# Altium PCB PCB2.PcbDoc
Units mm, origin at the board's own origin, x right, y up, seen from the top; angles counter-clockwise.
Board outline 212.09 x 134.75 mm, 2 copper layers (Top Layer, Bottom Layer); 121 components, 76 nets, 330 pads, 8 vias.
Unrouted connection lines stored in the file: 1.
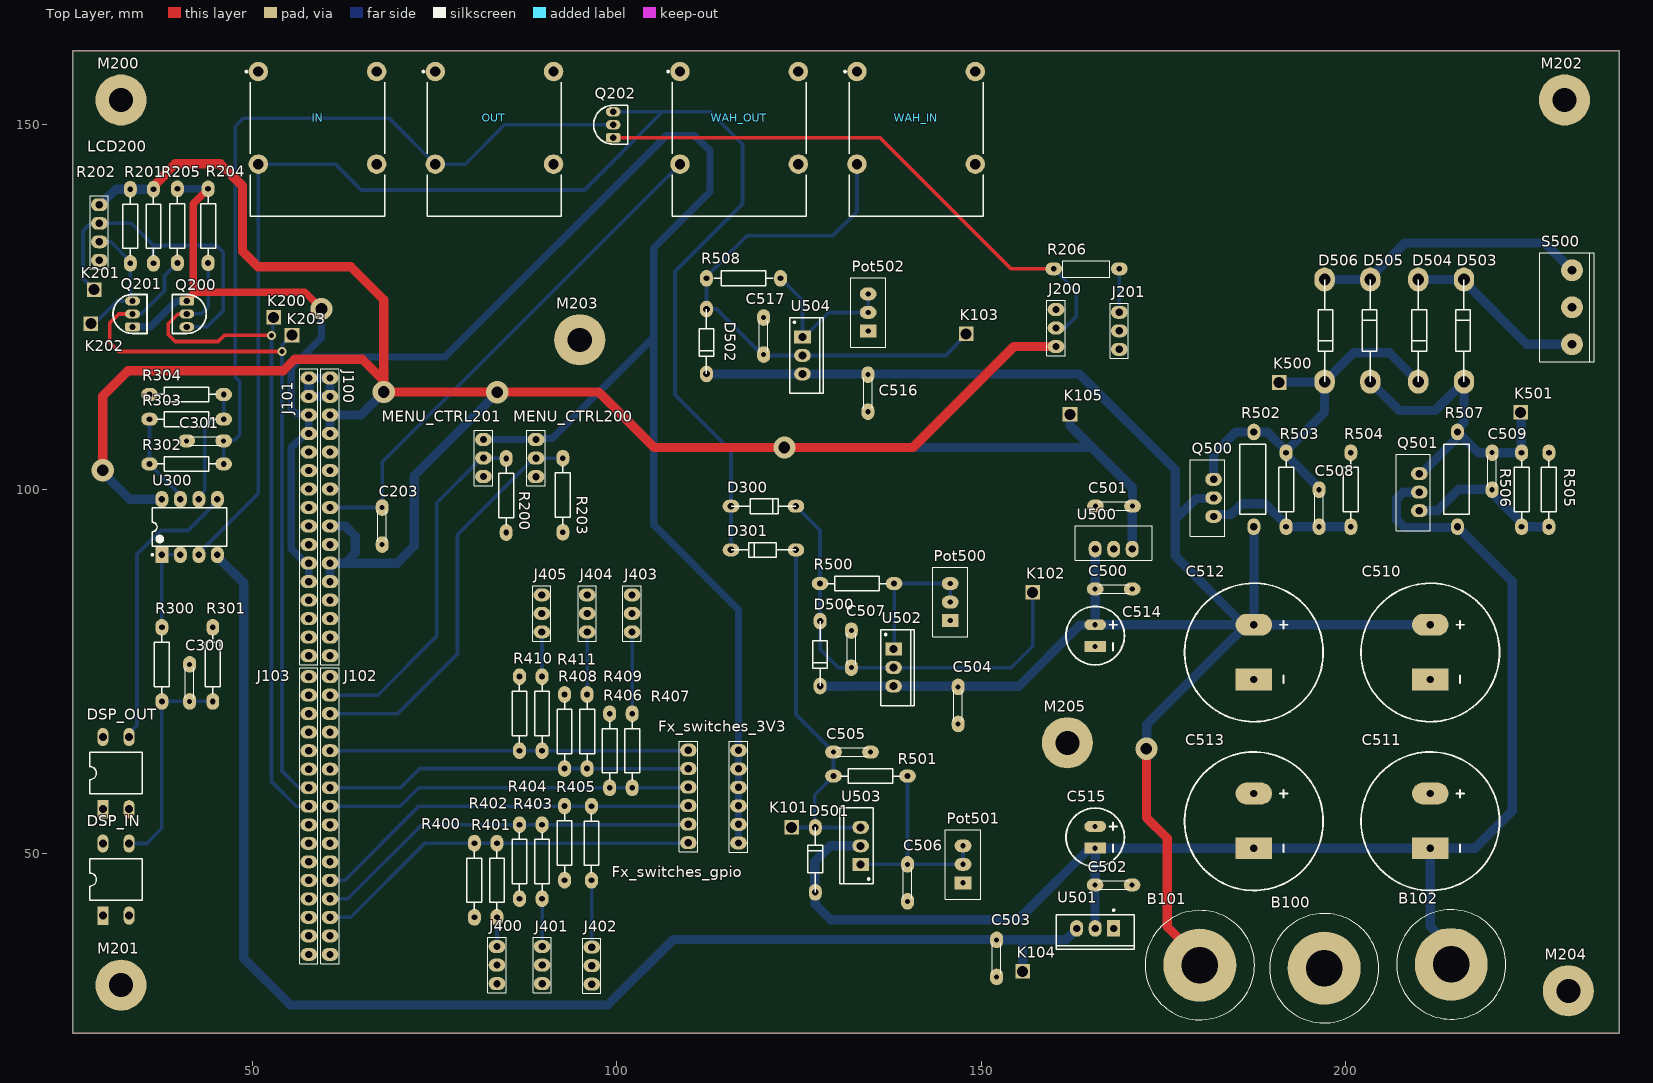
[diagram p0: Top Layer view]
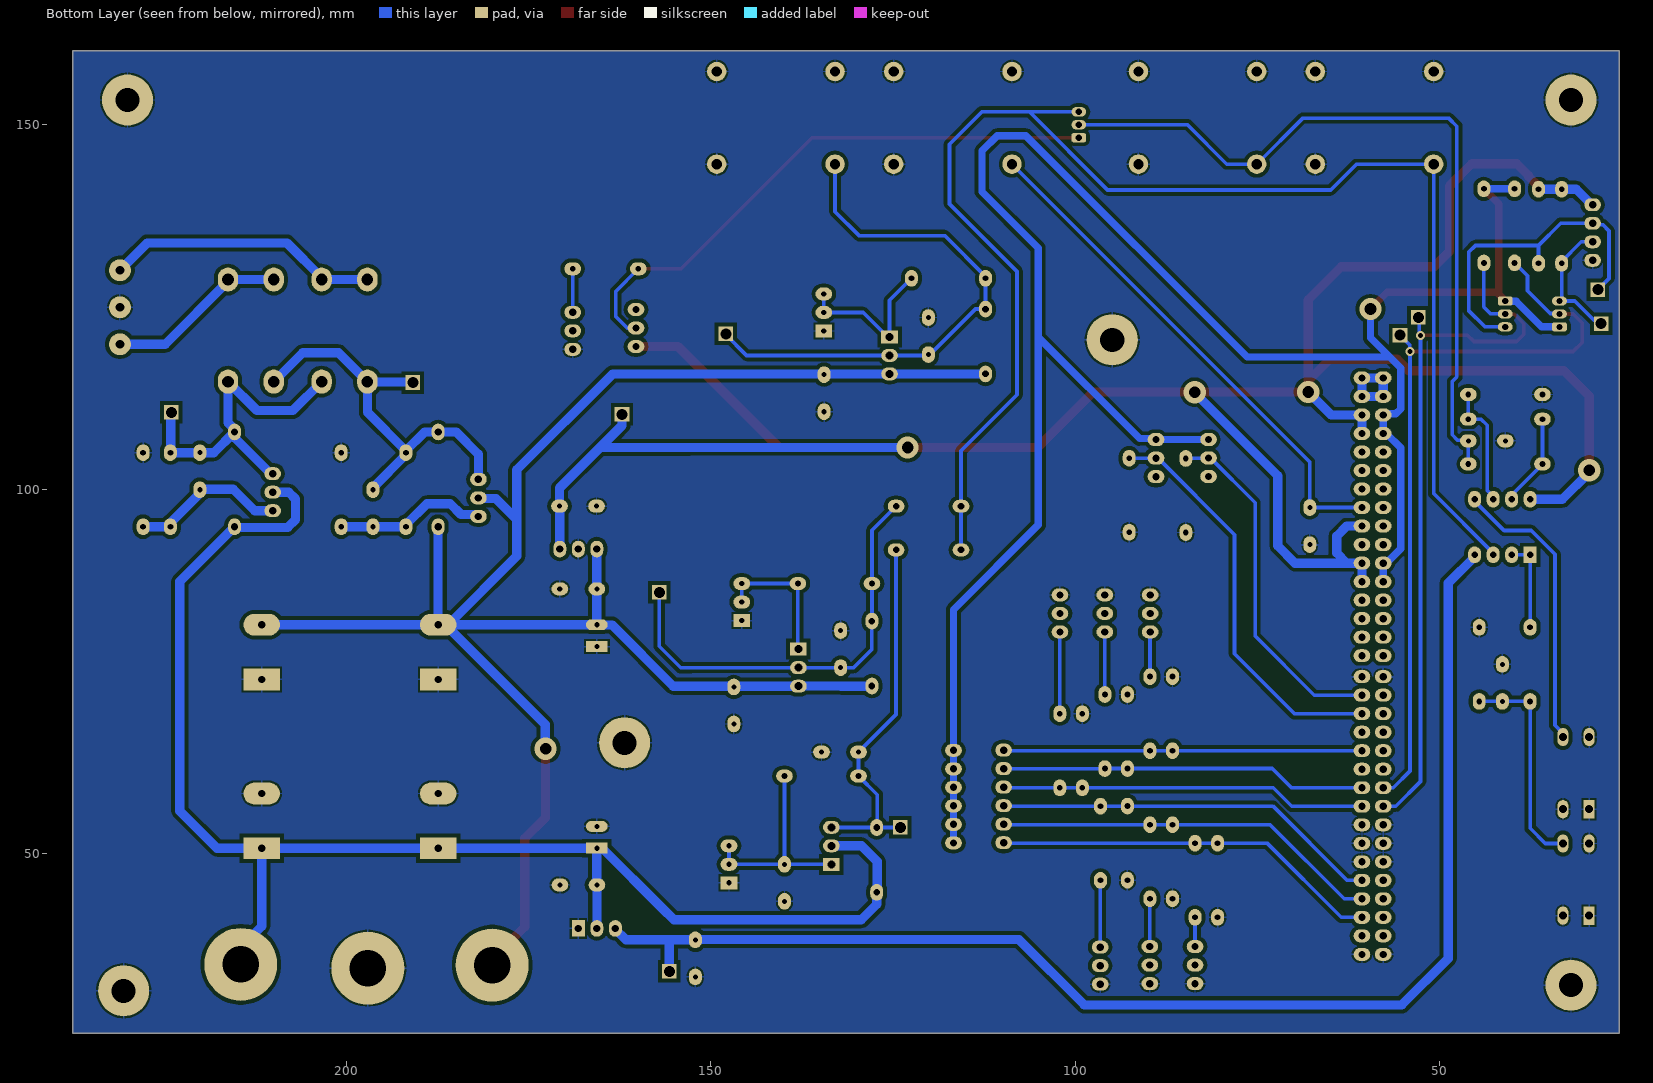
[diagram p1: Bottom Layer view, seen from below]

## Layer stack, top to bottom
Top Solder: solder mask 0.0102, Solder Resist, Dk 3.5
Top Layer: signal copper 0.0356
Dielectric 1: dielectric 0.32, FR-4, Dk 4.8
Bottom Layer: signal copper 0.0356
Bottom Solder: solder mask 0.0102, Solder Resist, Dk 3.5

## Board outline
25.4,25.4 237.49,25.4 237.49,160.147 25.4,160.147

## Design rules (kind name [scope] priority, off if disabled: settings)
Clearance [All] p1: gap=0.508 ignorepadtopadclearanceinfootprint=FALSE
PolygonConnect [All] p1: connectstyle=Relief reliefconductorwidth=0.254 reliefentries=4 polygonreliefangle="90 Angle" airgapwidth=0.254
RoutingVias [All] p1: holewidth=0.711 width=1.27 viastyle="Through Hole" minholewidth=0.711 minwidth=1.27 maxholewidth=0.711 maxwidth=1.27
SolderMaskExpansion [All] p1: expansion=0.102 istentingtop=FALSE
SupplyNets "Schematic Supply Nets_11" [InNet('+3V3')] p1: voltage=0.000
SupplyNets "Schematic Supply Nets_9" [InNet('+5V')] p2: voltage=0.000
SupplyNets "Schematic Supply Nets_8" [InNet('+2V')] p3: voltage=0.000
SupplyNets "Schematic Supply Nets_7" [InNet('-5V')] p4: voltage=0.000
SupplyNets "Schematic Supply Nets_6" [InNet('GND')] p5: voltage=0.000
SupplyNets "Schematic Supply Nets_5" [InNet('+1V75')] p6: voltage=0.000
SupplyNets "Schematic Supply Nets_4" [InNet('-6V')] p7: voltage=0.000
SupplyNets "Schematic Supply Nets_2" [InNet('-1V75')] p8: voltage=0.000
SupplyNets "Schematic Supply Nets_1" [InNet('+6V')] p9: voltage=0.000
Width [All] p1: maxlimit=1.27 minlimit=0.508 preferedwidth=0.508 minimp=50.000000 maximp=50.000000 favimp=50.000000
30 further rules are at their usual default settings.

## Classes and differential pairs
component class switches_connectors: C203 Fx_switches_3V3 J200 J201 K200 K201 K202 K203 LCD200 M200 M201 M202 M203 M204 M205 MENU_CTRL200 MENU_CTRL201 Q200 Q201 Q202 R200 R201 R202 R203 R204 R205 R206 WAH_IN
component class shift_registers: Fx_switches_gpio J400 J401 J402 J403 J404 J405 R400 R401 R402 R403 R404 R405 R406 R407 R408 R409 R410 R411
component class power_supply: C500 C501 C502 C503 C504 C505 C506 C507 C508 C509 C510 C511 C512 C513 C514 C515 C516 C517 D500 D501 D502 D503 D504 D505 D506 K500 K501 Pot500 Pot501 Pot502 Q500 Q501 R500 R501 R502 R503 R504 R505 R506 R507 R508 S500 U500 U501 U502 U503 U504
component class main: B100 B101 B102 J100 J101 J102 J103 K101 K102 K103 K104 K105
component class amplifier_stage: C300 C301 DSP_IN DSP_OUT IN OUT R300 R301 R302 R303 R304 U300

## Components (designator, comment, footprint, x,y, rotation, side; value= is the part's Value field where it differs from the comment)
B100 "Banana Plug" "Banana Plug through" 197.032,34.325 r0 top
B101 "Banana Plug" "Banana Plug through" 179.979,34.744 r0 top
B102 "Banana Plug" "Banana Plug through" 214.46,34.841 r0 top
C203 "Cap" Cap-1 67.825,92.426 r90 top value=100nF
C300 "Cap" Cap-1 41.41,75.999 r270 top value=12nF
C301 "Cap" Cap-1 41.001,106.658 r0 top value=5N5F
C500 "Cap" Cap-1 170.705,86.344 r180 top value=100nF
C501 "Cap" Cap-1 165.66,97.703 r0 top value=1uF
C502 "Cap" Cap-1 165.605,45.744 r0 top value=100nF
C503 "Cap" Cap-1 152.106,38.211 r270 top value=1uF
C504 "Cap" Cap-1 146.832,67.828 r90 top value=100nF
C505 "Cap" Cap-1 129.727,63.962 r0 top value=1uF
C506 "Cap" Cap-1 139.887,48.572 r270 top value=100nF
C507 "Cap" Cap-1 132.174,80.629 r270 top value=1uF
C508 "Cap" Cap-1 196.337,94.876 r90 top value=1uF
C509 "Cap" Cap-1 220.075,105.036 r270 top value=1uF
C510 "Cap" "Cap Lyt Ø18" 211.592,81.434 r270 top value=1000uF
C511 "Cap" "Cap Lyt Ø18" 211.592,58.281 r270 top value=1000uF
C512 "Cap" "Cap Lyt Ø18" 187.391,81.434 r270 top value=1000uF
C513 "Cap" "Cap Lyt Ø18" 187.391,58.281 r270 top value=1000uF
C514 "Cap" "Cap Lyt Ø8" 165.625,81.434 r270 top value=220uF
C515 "Cap" "Cap Lyt Ø8" 165.625,53.781 r270 top value=220uF
C516 "Cap" Cap-1 134.449,110.657 r90 top value=100nF
C517 "Cap" Cap-1 120.145,123.567 r270 top value=100nF
D300 "1N4007" 1N4007 115.674,97.694 r0 top
D301 "1N4007" 1N4007 124.574,91.699 r180 top
D500 "1N4007" 1N4007 127.887,81.934 r270 top
D501 "1N4007" 1N4007 127.231,44.724 r90 top
D502 "1N4007" 1N4007 112.307,124.736 r270 top
D503 "Diode" "Diode 1A" 216.212,114.784 r90 top
D504 "Diode" "Diode 1A" 209.933,128.784 r270 top
D505 "Diode" "Diode 1A" 203.371,114.784 r90 top
D506 "Diode" "Diode 1A" 197.092,128.784 r270 top
DSP_IN "3.5MMJACK" 3.5MMJACK 29.506,41.53 r90 top
DSP_OUT "3.5MMJACK" 3.5MMJACK 29.506,56.133 r90 top
Fx_switches_3V3 "Header 1x6" "Header 1x6" 116.703,51.509 r90 top
Fx_switches_gpio "Header 1x6" "Header 1x6" 109.826,64.233 r270 top
IN "NMJ4HFD2" FP-NMJ4HFD2-MFG 58.952,154.087 r90 top
J100 "Header 1x16" "Header 1x16" 60.675,77.186 r90 top
J101 "Header 1x16" "Header 1x16" 57.754,77.186 r90 top
J102 "Header 1x16" "Header 1x16" 60.675,36.215 r90 top
J103 "Header 1x16" "Header 1x16" 57.754,36.215 r90 top
J200 "Header 1x3" "Header 1x3"#1 160.252,119.593 r90 top
J201 "Header 1x3" "Header 1x3"#1 168.928,119.212 r90 top
J400 "Header 1x3" "Header 1x3"#1 83.564,32.209 r90 top
J401 "Header 1x3" "Header 1x3"#1 89.774,32.209 r90 top
J402 "Header 1x3" "Header 1x3"#1 96.576,32.132 r90 top
J403 "Header 1x3" "Header 1x3"#1 102.102,85.521 r270 top
J404 "Header 1x3" "Header 1x3"#1 95.951,85.521 r270 top
J405 "Header 1x3" "Header 1x3"#1 89.718,85.521 r270 top
K101 "Wire" "Wire 1.5mm" 123.983,53.632 r90 top
K102 "Wire" "Wire 1.5mm" 157.042,85.865 r90 top
K103 "Wire" "Wire 1.5mm" 147.924,121.327 r90 top
K104 "Wire" "Wire 1.5mm" 155.68,33.885 r90 top
K105 "Wire" "Wire 1.5mm" 162.171,110.291 r90 top
K200 "Wire" "Wire 1.5mm" 52.946,123.584 r90 top
K201 "Wire" "Wire 1.5mm" 28.315,127.412 r90 top
K202 "Wire" "Wire 1.5mm" 27.861,122.748 r90 top
K203 "Wire" "Wire 1.5mm" 55.454,121.16 r90 top
K500 "Wire" "Wire 1.5mm" 190.858,114.661 r90 top
K501 "Wire" "Wire 1.5mm" 223.993,110.553 r90 top
LCD200 "Header 1x4" "Header 1x4" 29.032,131.424 r90 top
M200 "Screw Hole" "M3 Hole" 32.004,153.416 r0 top
M201 "Screw Hole" "M3 Hole" 32.004,32.004 r0 top
M202 "Screw Hole" "M3 Hole" 229.997,153.416 r0 top
M203 "Screw Hole" "M3 Hole" 94.924,120.519 r0 top
M204 "Screw Hole" "M3 Hole" 230.523,31.22 r0 top
M205 "Screw Hole" "M3 Hole" 161.81,65.241 r0 top
MENU_CTRL200 "Header 1x3" "Header 1x3"#1 81.715,101.766 r90 top
MENU_CTRL201 "Header 1x3" "Header 1x3"#2 88.92,101.749 r90 top
OUT "NMJ4HFD2" FP-NMJ4HFD2-MFG 83.22,154.087 r90 top
Pot500 "Pot Trim" "Pot trim slim high" 145.743,84.538 r90 top value=1k
Pot501 "Pot Trim" "Pot trim slim high" 147.491,48.572 r90 top value=1k
Pot502 "Pot Trim" "Pot trim slim high" 134.487,124.268 r90 top value=1k
Q200 "ModelNum" TO-92_straight 41.025,125.342 r270 top
Q201 "ModelNum" TO-92_straight 33.58,122.795 r90 top
Q202 "ModelNum" TO-92_straight 99.508,148.745 r90 top
Q500 "ModelNum" TO-220#1 181.869,96.293 r90 top
Q501 "ModelNum" TO-220#1 210.083,97.073 r90 top
R200 "Res2" "AXIAL-0.4 PCBK"#1 84.835,99.166 r90 top value=1k
R201 "" "AXIAL-0.4 PCBK"#1 36.453,136.091 r90 top value=4k7
R202 "" "AXIAL-0.4 PCBK"#1 33.276,136.091 r90 top value=4k7
R203 "Res2" "AXIAL-0.4 PCBK"#1 92.599,99.201 r90 top value=1k
R204 "" "AXIAL-0.4 PCBK"#1 43.954,136.149 r90 top value=4k7
R205 "" "AXIAL-0.4 PCBK"#1 39.733,136.156 r90 top value=4k7
R206 "Resistor" "RES THT 9mm" 168.931,130.257 r180 top value=1K
R300 "Res2" "AXIAL-0.4 PCBK"#1 37.6,75.999 r270 top value=1k47
R301 "Res2" "AXIAL-0.4 PCBK"#1 44.585,75.999 r270 top value=1k
R302 "Res2" "AXIAL-0.4 PCBK"#1 41.001,103.492 r0 top value=1k47
R303 "Res2" "AXIAL-0.4 PCBK"#1 41.001,109.63 r180 top value=14k7
R304 "Res2" "AXIAL-0.4 PCBK"#1 41.001,113.017 r0 top value=10k
R400 "" "AXIAL-0.4 PCBK"#1 80.473,46.386 r90 top value=3k
R401 "" "AXIAL-0.4 PCBK"#1 83.565,46.386 r90 top value=300
R402 "" "AXIAL-0.4 PCBK"#1 86.658,48.93 r90 top value=3k
R403 "" "AXIAL-0.4 PCBK"#1 89.751,48.93 r90 top value=300
R404 "" "AXIAL-0.4 PCBK"#1 92.843,51.476 r90 top value=3k
R405 "" "AXIAL-0.4 PCBK"#1 96.535,51.459 r90 top value=300
R406 "" "AXIAL-0.4 PCBK"#1 99.029,64.153 r270 top value=3k
R407 "" "AXIAL-0.4 PCBK"#1 102.121,64.153 r270 top value=300
R408 "" "AXIAL-0.4 PCBK"#1 92.843,66.783 r270 top value=3k
R409 "" "AXIAL-0.4 PCBK"#1 95.936,66.783 r270 top value=300
R410 "" "AXIAL-0.4 PCBK"#1 86.658,69.233 r270 top value=3k
R411 "" "AXIAL-0.4 PCBK"#1 89.751,69.233 r270 top value=300
R500 "" "AXIAL-0.4 PCBK"#1 132.967,87.087 r180 top value=240
R501 "" "AXIAL-0.4 PCBK"#1 134.807,60.683 r0 top value=120
R502 "10" "POW RES THT 13mm" 187.391,107.876 r270 top
R503 "" "AXIAL-0.4 PCBK"#1 191.818,99.956 r90 top value=200k
R504 "" "AXIAL-0.4 PCBK"#1 200.684,99.956 r270 top value=10k
R505 "" "AXIAL-0.4 PCBK"#1 227.856,99.956 r90 top value=10k
R506 "" "AXIAL-0.4 PCBK"#1 224.12,99.956 r270 top value=200k
R507 "10" "POW RES THT 13mm" 215.313,107.876 r270 top
R508 "" "AXIAL-0.4 PCBK"#2 117.387,128.957 r180 top value=240
S500 "Screw 3" Screw-3 231.04,119.905 r90 top
U300 "OP275GPZ" ADI-N-8 41.41,94.841 r90 top
U500 "LM7805" TO-220#2 165.625,91.809 r0 top
U501 "LM7905CT/NOPB" NDE0003A 165.625,39.781 r180 top
U502 "LM317T" TO-220#3 137.974,75.545 r270 top
U503 "LM337SP" TO220 133.453,51.109 r90 top
U504 "LM317T" TO-220#3 125.471,118.376 r270 top
WAH_IN "NMJ4HFD2" FP-NMJ4HFD2-MFG 141.06,154.087 r90 top
WAH_OUT "NMJ4HFD2" FP-NMJ4HFD2-MFG 116.792,154.087 r90 top

## Footprints (in the part's own frame and the unit in brackets; to place one, negate y for a bottom-side part, rotate by r counter-clockwise, add the part's x,y. Pads: shape width x height; smd on the part's side, far side on the other; paste and mask are expansions set on the pad)
1N4007 [mil]
  oval 90x70 hole 35.43: 1(0,0) 2(350.39,0)
  silkscreen extent 0,-40 350,40
3.5MMJACK [mm]
  rect 2.5x1.5 hole 1.1: 1(0,0)
  oval 2.5x1.5 hole 1.1: 2(0,-3.6) 3(9.9,-3.6) 4(9.9,0)
  silkscreen extent 2.08,-5.4 7.82,1.8
ADI-N-8 [mil] "DIP, 8-Leads, Body 9.59x6.6mm, Pitch 2.54mm"
  rect 90x70 hole 35.43: 1(-150,150)
  oval 90x70 hole 35.43: 2(-150,50) 3(-150,-50) 4(-150,-150) 5(150,-150) 6(150,-50) 7(150,50) 8(150,150)
  silkscreen extent -155,-201 104,206, body extent -155,-200 155,200, height 210
"AXIAL-0.4 PCBK"#1 [mil]
  oval 90x70 hole 31.5: 1(-200,0) 2(200,0)
  silkscreen extent -160,-40 160,40
"AXIAL-0.4 PCBK"#2 [mil]
  oval 70x90 hole 31.5: 1(-200,0) 2(200,0)
  silkscreen extent -160,-40 160,40
"Banana Plug through" [mm] "Banana Plug"
  round 10 hole 5: 1(0,0)
  silkscreen extent -7.5,-7.5 7.5,7.5
"Cap Lyt Ø8" [mm] "Capacitor"
  oval 1.5x3 hole 0.7: 1(0,0)
  rect 1.5x3 hole 0.7: 2(3,0)
  silkscreen extent -2.5,-4 5.5,4
"Cap Lyt Ø18" [mm] "Capacitor"
  oval 3x5 hole 1: 1(0,0)
  rect 3x5 hole 1: 2(7.5,0)
  silkscreen extent -5.7,-9.5 13.3,9.5, body extent -5.5,-9.25 13,9.25, height 38
Cap-1 [mil] "Capacitor with 1 space"
  oval 90x70 hole 27.56: 1(0,0) 2(200,0)
  silkscreen extent 18,-23 182,23
"Diode 1A" [mil]
  oval 130x110 hole 62.99: 1(0,0) 2(551.18,0)
  silkscreen extent 0,-35 551,45
FP-NMJ4HFD2-MFG [mm]
  round 2.667 hole 1.4 paste-2539.97 mask+0: S(3.225,8.115) SN(3.225,-8.115) T(-9.475,8.115) TN(-9.475,-8.115)
  silkscreen extent -16.63,-9.2 3.35,9.87, body extent -16.73,-9.3 16.73,9.3, height 0.25
"Header 1x3"#1 [mil]
  oval 70x90 hole 39.37: 1(0,0) 2(100,0) 3(200,0)
  silkscreen extent -49,-49 249,49, body extent -50,-50 250,50, height 350
"Header 1x3"#2 [mil]
  oval 70.99x90.99 hole 39.37: 1(0,0) 2(100,0) 3(200,0)
  silkscreen extent -49,-49 249,49, body extent -50,-50 250,50, height 350
"Header 1x4" [mil]
  oval 70x90 hole 39.37: 1(0,0) 2(100,0) 3(200,0) 4(300,0)
  silkscreen extent -49,-49 349,49, body extent -50,-50 350,50, height 350
"Header 1x6" [mil]
  oval 70x90 hole 39.37: 1(0,0) 2(100,0) 3(200,0) 4(300,0) 5(400,0) 6(500,0)
  silkscreen extent -49,-49 549,49, body extent -50,-50 550,50, height 350
"Header 1x16" [mil]
  oval 70x90 hole 39.37: 1(0,0) 2(100,0) 3(200,0) 4(300,0) 5(400,0) 6(500,0) 7(600,0) 8(700,0) 9(800,0) 10(900,0) 11(1000,0) 12(1100,0) 13(1200,0) 14(1300,0) 15(1400,0) 16(1500,0)
  silkscreen extent -49,-49 1549,49, body extent -50,-50 1550,50, height 350
"M3 Hole" [mm]
  round 7 hole 3.3 mask+0: 1(0,0)
NDE0003A [mil] "FM, 3-Leads, Body 10.7x4.7mm, Pitch 2.54mm"
  rect 70x90 hole 39.37: 1(-100,0)
  oval 70x90 hole 39.37: 2(0,0) 3(100,0)
  silkscreen extent -211,-103 211,112, body extent -213,-75 213,114, height 764
"Pot trim slim high" [mil]
  rect 70x90 hole 27.95: 1(-100,0)
  oval 70x90 hole 27.95: 2(0,0) 3(100,0)
  silkscreen extent -188,-95 188,95, body extent -188,-95 188,95, height 455
"POW RES THT 13mm" [mil]
  oval 90x70 hole 39.37: 1(0,0) 2(511.81,0)
  silkscreen extent 66,-75 445,65
"RES THT 9mm" [mil]
  oval 90x70 hole 31.5: 1(0,0) 2(354.33,0)
  silkscreen extent 50,-44 304,44, body extent -13,-45 365,45, height 93
Screw-3 [mm] "Screw Terminal with 3 connections"
  round 3 hole 1.2: 1(0,0) 2(5.075,0) 3(10.15,0)
  silkscreen extent -2.37,-3.03 12.52,4.43, body extent -2.95,-3.8 12.55,4, height 10.3
TO220 [mil] "TO, Thru-Hole, Vertical, Heatsink Mounted; 3 In-Line Leads; Pitch 2.54 mm"
  rect 70x90 hole 43.31: 1(-100,0)
  oval 70x90 hole 43.31: 2(0,0) 3(100,0)
  silkscreen extent -205,-69 205,112, body extent -207,-71 207,114, height 776
TO-92_straight [mm] "Transistor Outline 3 leads"
  rrect50% 1.27x2.033 hole 0.85 mask+0.05: 1(-0.508,0)
  oval 1.27x2.033 hole 0.85 mask+0.05: 2(1.27,0) 3(3.048,0)
  silkscreen extent -1.4,-2 3.94,2.67, body extent -1.24,-1.85 3.78,2.5, height 5.4
TO-220#1 [mil] "Transistor Outline 3 leads"
  oval 70x90 hole 39.37: 1(0,0) 2(100,0) 3(200,0)
  silkscreen extent -107,-60 306,125, body extent -101,-73 300,116, height 744
TO-220#2 [mil] "Transistor Outline 3 leads"
  oval 70x90 hole 39.37: 1(0,0) 3(200,0) ""(100,0)
  silkscreen extent -107,-60 306,125, body extent -101,-73 300,116, height 744
TO-220#3 [mil] "TO, Thru-Hole, Vertical, Heatsink Mounted; 3 In-Line Leads; Pitch 2.54 mm"
  rect 70x90 hole 43.31: 1(-100,0)
  oval 70x90 hole 43.31: 2(0,0) 3(100,0)
  silkscreen extent -205,-69 205,112, body extent -207,-71 207,114, height 776
"Wire 1.5mm" [mm]
  rect 2x2 hole 1.5: 1(0,0)

## Part data
C203 C300 C301 C500 C501 C502 C503 C504 C505 C506 C507 C508 C509 C516 C517: library part "Capacitor 1 space"
C510 C511 C512 C513 C514 C515: library part "Capacitor electrolytic"
IN OUT WAH_IN WAH_OUT: library part CMP-78736-000001-1, "Conn 1/4\" Mono Jack F 3 POS Solder RA Thru-Hole 3 Terminal 1 Port", Current Rating=0.5A, Manufacturer=Neutrik, Package=0, Temperature="-25°C to +70°C", Temperature Range High=+70°C, Temperature Range Low=-25°C, Voltage Rating=50V, Automotive=No, Category=Conn, ComponentLink2Description=Datasheet, ComponentLink2URL=https://www.neutrik.com/en/product/nmj4hfd2.pdf, Conn Orientation=Horizontal, Contact Material=Silver, Device Class L1=Connectors, Device Class L2="Audio / Video Connectors", Device Class L3=unset, Footprint Url=https://www.neutrik.com/media/8576/download/st-nmj4hfd2.pdf?v=1, Height=15.89mm, Is Female=yes, Lead Free=Yes, Manufacturer Part Number=NMJ4HFD2, Mouser Description="Phone Audio Connector, Socket, 2, PCB Mount, Metal Body, Silver Plated Contacts", Number Of Contacts=2, Octopart=https://octopart.com/nmj4hfd2-neutrik-758952, RoHS=TRUE
Pot500 Pot501 Pot502: "Potentiometer"
Q200 Q201 Q202 Q501: library part "MOSFET N-Channel", Model=ModelNumber
Q500: library part "MOSFET P-Channel", Model=ModelNumber
R200 R201 R202 R203 R204 R205 R300 R301 R302 R303 R304 R400 R401 R402 R403 R404 R405 R406 R407 R408 R409 R410 R411 R500 R501 R503 R504 R505 R506 R508: library part "Res PCBK", "Resistor", LatestRevisionDate=17-Jul-2002, LatestRevisionNote="Re-released for DXP Platform.", PackageReference=AXIAL-0.4, Published=8-Jun-2000, Publisher="Altium Limited"
R502 R507: library part "POW RES THT 13mm"
U300: library part CMP-0384-00207-1, "Double Channel Excellent Sonic Characteristics Operational Amplifier, 9 MHz BW, 22 V/us SR, Industrial, 8-pin DIP (N-8), Tube", Amplifiers Per Package=2, Generic Part Number=OP275, Input Bias Current=100nA, Input Offset Voltage=1mV, Manufacturer="Analog Devices", Code_JEDEC=MS-001, ComponentLink1Description="Manufacturer URL", ComponentLink1URL=http://www.analog.com/en/index.html, ComponentLink2Description=Datasheet, ComponentLink2URL=http://www.analog.com/static/imported-files/data_sheets/OP275.pdf, ComponentLink3Description="Package Specification", ComponentLink3URL=http:/www.analog.com/static/imported-files/packages/PKG_PDF/PDIP(N)/N_8.pdf, DatasheetVersion="Rev. C", Iq/Amp=2.5mA, Mounting Technology="Through Hole", PackageDescription="8-Pin Plastic Dual In-Line Package, Row spacing 7.62 mm, Pitch 2.54 mm", PackageReference=N-8, PackageVersion=070606-A, PartNumber=OP275GPZ, Slew Rate=22V/us, Small Signal Bandwidth=9MHz, V Span Max=44V, V Span Min=9V
U500: library part "Voltage Regulator"
U501: library part CMP-0062-02481-3, "3-Terminal Negative Regulator, 3-pin TO-220, Pb-Free", Manufacturer="Texas Instruments", PackageTopMarking=NSUZXYTTE#*LM7905CT, PowerWise=N, ComponentLink1Description="Datasheet URL", ComponentLink1URL=http://www.ti.com/general/docs/lit/getliterature.tsp?genericPartNumber=LM7905&fileType=pdf, CompType="LDO IC", PackageDescription="TO-220, Molded, 3 Lead, Straight", PackageReference=NDE0003A, PinCount=3, RoHS=Y
U502 U504: library part CMP-0244-00444-1, "1.5A, 1.2V to 37V Adjustable Voltage Regulator, 3-Pin TO-220", ComponentLink1Description="Manufacturer URL", ComponentLink1URL=http://www.st.com, ComponentLink2Description=Datasheet, ComponentLink2URL=http://www.st.com/internet/com/TECHNICAL_RESOURCES/TECHNICAL_LITERATURE/DATASHEET/CD00000455.pdf, ComponentLink3Description="Package Specification", ComponentLink3URL=http://www.st.com/internet/com/TECHNICAL_RESOURCES/TECHNICAL_LITERATURE/PACKAGE_INFORMATION/CD00004649.pdf, DatasheetVersion=1/11/2011, PackageDescription="TO, Thru-Hole, Vertical, Heatsink Mounted; 3 In-Line Leads; Pitch 2.54 mm", PackageReference=TO-220, PackageVersion=2011
U503: library part CMP-0244-00420-1, "Three-Terminal Negative Voltage Regulator, 3-Pin TO-220", ComponentLink1Description="Manufacturer URL", ComponentLink1URL=http://www.st.com, ComponentLink2Description=Datasheet, ComponentLink2URL=http://www.st.com/internet/com/TECHNICAL_RESOURCES/TECHNICAL_LITERATURE/DATASHEET/CD00000468.pdf, ComponentLink3Description="Package Specification", ComponentLink3URL=http://www.st.com/internet/com/TECHNICAL_RESOURCES/TECHNICAL_LITERATURE/PACKAGE_INFORMATION/CD00004649.pdf, DatasheetVersion=1/10/2011, PackageDescription="TO, Thru-Hole, Vertical, Heatsink Mounted; 3 In-Line Leads; Pitch 2.54 mm", PackageReference=TO220, PackageVersion=ver3.0

## Via types
v1: diameter 3.048, hole 1.6, Top Layer to Bottom Layer, 6 vias
v2: diameter 1.27, hole 0.711, Top Layer to Bottom Layer, 2 vias

## Nets (pads, with @x,y where several pads share a name; then routed paths per layer and width w, separated by ;. In a path a pad name is that pad's centre, name@x,y a point inside that pad or via, vN(x,y) a via of type N, cw(c..) or ccw(c..) an arc to the next point about the centre after c; other vN are vias at no path point)
+1V75: C507.2 D300.2 D500.1 K102.1 R500.2 U502.2 | length 59.8
  Bottom Layer w0.508: D300.2@124.55,97.718 D300.2 127.887,94.381 R500.2 D500.1 D500.1@127.887,81.905 ; D500.1@127.915,81.905 127.915,78.031 130.401,75.545 U502.2 152.62,75.545 ; 152.646,75.545 154.113,75.545 157.046,78.478 157.046,85.861 K102.1
+2V: C517.2 D502.1 K103.1 R508.2 U504.2 WAH_IN.T | length 74.8
  Bottom Layer w0.508: WAH_IN.T 132.945,138.092 129.665,134.811 117.907,134.811 112.307,129.211 R508.2 D502.1 113.685,124.736 120.045,118.376 U504.2 140.753,118.376 145.083,118.376 K103.1@147.979,121.272
+3V3: Fx_switches_3V3.1 Fx_switches_3V3.2 Fx_switches_3V3.3 Fx_switches_3V3.4 Fx_switches_3V3.5 Fx_switches_3V3.6 J101.5 J101.6 J101.13 J101.14 MENU_CTRL200.3 MENU_CTRL201.3 Q200.1 Q201.1 R204.2 R205.2 | length 295.2
  Top Layer w1.016: Q200.1@41.466,125.85 41.534,125.918 41.534,126.359 41.913,126.738 41.913,139.188 R204.2 ; Q200.1@41.534,125.85 Q200.1 41.314,126.139 42.19,127.015 57.235,127.015 v1(59.497,124.753)
  Bottom Layer w1.016: Q201.1 36.04,122.287 39.535,125.782 40.957,125.782 Q200.1 ; R205.2@39.75,141.252 R205.2 39.736,141.232 43.951,141.232 R204.2 ; J101.14@57.5,110.206 J101.14 ; J101.5 J101.6 57.346,89.886 55.366,91.866 55.366,105.686 57.346,107.666 J101.13 J101.14 ; v1(59.497,124.753) 59.497,120.781 56.88,118.164 ; MENU_CTRL200.3 81.723,106.837 88.911,106.837 MENU_CTRL201.3 89.071,106.979 91.164,106.979 105.058,120.873 ; Fx_switches_3V3.1 Fx_switches_3V3.2 Fx_switches_3V3.3 Fx_switches_3V3.4 Fx_switches_3V3.5 Fx_switches_3V3.6 116.703,83.488 105.058,95.133 105.058,120.873 ; 56.88,118.164 76.43,118.164 106.765,148.499 110.719,148.499 112.794,146.424 112.794,140.848 105.058,133.112 105.058,120.873 ; 56.88,118.164 55.366,116.65 55.366,111.03 56.044,110.352 57.608,110.352 J101.14
+5V: C501.2 J100.5 J100.6 J100.8 J100.13 J100.14 J200.1 K105.1 LCD200.4 R201.2 R202.2 U300.8 U500.3 | length 354.9
  Top Layer w1.27: v1(29.509,102.623) 29.509,112.809 32.961,116.261 54.259,116.261 55.84,117.842 65.096,117.842 68.039,114.898 ; R201.2 36.453,141.562 37.853,142.962 37.853,143.078 39.445,144.671 45.609,144.671 48.67,141.609 48.67,132.653 50.787,130.537 63.51,130.537 68.039,126.007 68.039,114.898 ; J200.1 154.491,119.593 140.646,105.748 v1(122.993,105.748) 105.161,105.748 97.541,113.368 83.622,113.368 v1(68.039,113.368) 68.039,114.898
  Bottom Layer w1.27: LCD200.4 29.149,139.044 31.276,141.171 R201.2 ; v1(29.509,102.623) 29.509,102.328 33.187,98.651 U300.8 ; J100.5 J100.6 62.742,89.886 ; J100.8 62.77,94.966 64.144,93.591 64.144,91.288 62.742,89.886 ; J100.13 J100.14 64.877,110.206 v1(68.039,113.368) ; v1(83.622,113.332) 83.622,113.267 72.234,101.878 72.234,92.259 69.861,89.886 62.742,89.886 ; v1(122.993,105.748) 152.815,105.748 152.817,105.75 165.184,105.75 ; K105.1 162.171,108.763 165.184,105.75 ; U500.3 170.705,97.669 C501.2 170.74,100.194 165.184,105.75
+6V: B101.1 C500.2 C504.2 C510.1 C512.1 C514.1 C516.2 D500.2 D502.2 Q500.2 R502.2 U500.1 U502.3 U504.3 | length 267.9
  Top Layer w1.27: v1(172.649,64.43) 172.649,55.003 175.493,52.159 175.493,40.024 179.979,35.538 B101.1
  Bottom Layer w1.27: D502.2 117.778,115.836 U504.3 163.453,115.836 176.592,102.696 176.592,95.871 ; D500.2@127.887,72.976 127.915,73.005 132.152,73.005 132.181,73.034 132.269,73.034 132.284,73.02 137.96,73.02 U502.3 146.832,73.005 155.123,73.005 163.508,81.39 165.581,81.39 C514.1 ; U500.1 C500.2 C514.1 ; v1(172.649,64.43) 172.715,64.496 172.715,67.757 C512.1@186.391,81.434 ; Q500.2 181.772,98.735 179.456,98.735 176.592,95.871 ; R502.2@187.394,94.873 C512.1@187.394,81.434 ; C510.1 C512.1@187.394,81.434 ; C514.1 C512.1@186.01,81.434 ; 176.592,95.871 176.592,90.852 C512.1@186.01,81.434 ; C512.1@186.01,81.434 C512.1@187.394,81.434
-1V75: C505.1 D301.1 D501.2 K101.1 R501.1 U503.3 | length 50.7
  Bottom Layer w0.508: K101.1 123.992,53.624 D501.2 U503.3@133.427,53.624 ; D301.1 124.574,69.116 C505.1 R501.1 127.168,58.123 D501.2@127.168,53.649
-5V: C503.1 K104.1 U300.4 U501.3 | length 182.5
  Bottom Layer w1.27: U300.4 45.22,90.777 48.847,87.15 48.847,35.649 55.206,29.289 98.762,29.289 107.729,38.257 C503.1@152.106,38.257 ; C503.1 155.68,38.211 ; K104.1 155.68,38.211 ; U501.3 163.085,39.664 161.632,38.211 155.68,38.211
-6V: B102.1 C502.1 C511.2 C513.2 C515.2 D501.1 Q501.2 R507.2 U501.2 U503.2 | length 201.6
  Bottom Layer w1.27: U503.2 129.314,51.109 127.168,48.963 127.168,44.879 127.206,44.841 127.206,44.686 127.228,44.664 127.228,43.084 129.36,40.952 155.047,40.952 156.613,42.519 164.875,50.781 C515.2 ; C502.1 C502.1@165.625,45.744 ; U501.2 165.615,39.791 165.615,45.734 C502.1@165.625,45.744 ; Q501.2 207.893,99.613 206.963,98.683 206.963,95.843 208.02,94.786 215.223,94.786 R507.2 222.818,87.371 222.818,55.887 217.712,50.781 C511.2 ; B102.1@214.928,34.841 B102.1 214.46,37.204 211.592,40.072 C511.2 ; C502.1@165.625,45.744 C515.2 ; C515.2 C513.2 C511.2
GND: B100.1 C203.1 C300.1 C301.1 C500.1 C501.1 C502.2 C503.2 C504.1 C505.2 C506.2 C507.1 C510.2 C511.1 C512.2 C513.1 C514.2 C515.1 C516.1 C517.1 DSP_IN.1 DSP_IN.2 DSP_IN.4 DSP_OUT.1 DSP_OUT.2 DSP_OUT.4 IN.S IN.SN IN.TN J102.1 J102.6 J102.7 J102.8 J102.16 J103.1 J103.6 J103.7 J103.8 J103.16 J201.1 J400.1 J401.1 J402.1 J403.1 J404.1 J405.1 LCD200.1 M200.1 M201.1 M202.1 M203.1 M204.1 M205.1 OUT.S OUT.SN OUT.TN Pot500.1 Pot501.1 Pot502.1 R200.1 R203.1 R301.1 R304.1 R400.1 R402.1 R404.1 R406.1 R408.1 R410.1 R504.1 R505.2 S500.2 U500. U501.1 WAH_IN.S WAH_IN.SN WAH_IN.TN WAH_OUT.S WAH_OUT.SN WAH_OUT.TN
GPAIN0: J100.12
GPAIN1: J100.11
GPAIN2: J100.10
GPAIN3: C203.2 J100.9 WAH_OUT.T | length 71.2
  Bottom Layer w0.508: J100.9 C203.2 67.825,103.76 WAH_OUT.T
GPIO4: J102.15 MENU_CTRL200.2 R200.2 | length 48.4
  Bottom Layer w0.508: J102.15 67.221,71.775 75.325,79.879 75.325,98.17 81.461,104.306 MENU_CTRL200.2 81.744,104.276 84.805,104.276 R200.2 R200.2@84.818,104.23
GPIO5: J102.14 MENU_CTRL201.2 R203.2 | length 56
  Bottom Layer w0.508: J102.14 69.936,69.235 78.149,77.449 78.149,93.772 88.666,104.289 MENU_CTRL201.2 88.924,104.285 92.595,104.285 R203.2
GPIO10: J102.13
GPIO11: Fx_switches_gpio.1 J102.12 R410.2 R411.2 | length 49.2
  Bottom Layer w0.508: J102.12 J102.12 86.657,64.154 R410.2 R411.2 89.754,64.157 109.749,64.157 Fx_switches_gpio.1
GPIO12: Fx_switches_gpio.6 J102.3 R400.2 R401.2 | length 53.4
  Bottom Layer w0.508: J102.3 63.502,41.295 73.686,51.479 80.46,51.479 R400.2 R401.2 109.759,51.466 Fx_switches_gpio.6
GPIO13: J102.2
GPIO14: Fx_switches_gpio.5 J102.4 R402.2 R403.2 | length 53.4
  Bottom Layer w0.508: J102.4 63.098,43.835 73.272,54.01 R402.2 R403.2 89.755,54.005 109.758,54.005 Fx_switches_gpio.5
GPIO15: Fx_switches_gpio.4 J102.5 R404.2 R405.2 | length 53.4
  Bottom Layer w0.508: J102.5 62.711,46.375 72.892,56.556 R404.2 92.852,56.548 96.526,56.548 R405.2 96.546,56.529 109.741,56.529 Fx_switches_gpio.4
GPIO16: Fx_switches_gpio.3 J102.9 R406.2 R407.2 | length 50.2
  Bottom Layer w0.508: J102.9 70.29,56.535 72.827,59.073 R406.2 R407.2 102.125,59.077 109.749,59.077 Fx_switches_gpio.3
GPIO17: Fx_switches_gpio.2 J102.10 R408.2 R409.2 | length 50.3
  Bottom Layer w0.508: J102.10 70.339,59.075 72.967,61.703 R408.2 R409.2 95.977,61.662 109.795,61.662 Fx_switches_gpio.2
I2C_SCL: J103.10 K203.1 Q201.2 R205.1 | length 105.7
  Top Layer w0.508: Q201.2 31.701,124.065 30.461,122.826 30.461,120.159 31.707,118.914 54.089,118.914 v2(54.096,118.921)
  Bottom Layer w0.508: Q201.2 33.629,124.114 34.848,124.114 37.977,127.243 37.977,129.319 R205.1 ; K203.1 54.115,119.821 54.115,118.94 v2(54.096,118.921) 54.096,61.357 56.369,59.084 57.746,59.084 J103.10
I2C_SDA: J103.9 K200.1 Q200.2 R204.1 | length 99.6
  Top Layer w0.508: Q200.2 40.966,124.013 39.767,124.013 38.465,122.711 38.465,121.257 39.448,120.275 45.302,120.275 46.15,121.123 v2(52.651,121.123)
  Bottom Layer w0.508: Q200.2@40.902,123.949 Q200.2 42.992,124.072 43.954,125.035 R204.1 ; K200.1@53.095,123.732 52.797,123.435 52.797,121.269 v2(52.651,121.123) 52.651,59.914 56.03,56.535 J103.9
I2S0_CLK: J101.7
I2S0_DX: J101.9
I2S0_FS: J101.10
I2S0_RX: J101.8
I2S1_CLK: J101.1
I2S1_DX: J101.3
I2S1_FS: J101.4
I2S1_RX: J101.2
I2S2_CLK: J103.12
I2S2_DX: J103.14
I2S2_FS: J103.15
I2S2_RX: J103.13
KEY: J102.11 J103.11
NC: J100.15 J100.16 J101.15 J101.16 | length 10.9
  Bottom Layer w1.27: J101.15 J100.15 J100.16 J101.16 J101.15
NetC300_2: C300.2 DSP_IN.3 R300.2 R301.2 | length 29.8
  Bottom Layer w0.508: DSP_IN.3 35.521,51.43 37.6,53.51 R300.2 C300.2 R301.2
NetC301_2: C301.2 OUT.T Q202.2 R302.2 | length 105.4
  Bottom Layer w0.508: R302.2 C301.2 46.172,106.749 47.562,106.749 48.297,107.484 48.297,114.796 47.66,115.434 47.66,149.808 48.742,150.89 68.826,150.89 OUT.T 79.208,144.612 84.611,150.015 Q202.2
NetC506_1: C506.1 Pot501.2 Pot501.3 R501.2 U503.1 | length 28.7
  Bottom Layer w0.508: U503.1 133.456,48.572 C506.1 ; R501.2 C506.1 ; Pot501.3 Pot501.2 C506.1
NetC508_1: C508.1 Q500.1 R503.1 R504.2 | length 21
  Bottom Layer w1.27: Q500.1 182.26,96.293 182.514,96.547 184.258,96.547 185.749,98.037 188.911,98.037 191.818,95.13 R503.1 C508.1 R504.2
NetC508_2: C508.2 D504.2 D506.2 K500.1 Q500.3 R502.1 R503.2 | length 57.8
  Bottom Layer w1.27: Q500.3 181.869,104.821 184.923,107.876 R502.1 189.232,107.876 R503.2@191.818,105.29 ; K500.1 190.92,114.722 197.031,114.722 D506.2 ; C508.2 196.337,100.237 191.818,104.755 R503.2 R503.2@191.818,105.29 ; D504.2@210.479,115.33 D504.2 205.966,118.751 201.059,118.751 D506.2 ; R503.2@191.818,105.29 197.092,110.564 D506.2
NetC509_1: C509.1 D503.1 D505.1 K501.1 Q501.3 R506.1 R507.1 | length 47
  Bottom Layer w1.27: D505.1 207.347,110.808 212.236,110.808 D503.1 216.212,109.128 215.313,108.23 R507.1 ; Q501.3 210.337,102.153 215.216,107.032 215.216,107.779 R507.1 ; K501.1 224.056,110.489 224.056,105.1 R506.1 C509.1 218.153,105.036 R507.1
NetC509_2: C509.2 Q501.1 R505.1 R506.2 | length 21.7
  Bottom Layer w1.27: Q501.1 212.556,97.073 215.506,100.023 220.008,100.023 C509.2 220.075,99.439 224.12,95.393 R506.2 R505.1
NetD300_1: D300.1 D301.2 IN.T Q202.3 U300.3 | length 200.1
  Bottom Layer w0.508: U300.3 42.68,91.285 50.837,99.441 IN.T 61.428,144.612 61.6,144.439 64.969,141.071 95.568,141.071 106.291,151.793 ; Q202.3 106.291,151.793 ; D301.2@115.697,92.159 115.674,92.183 D300.1 115.674,105.284 107.979,112.979 107.979,129.898 117.238,139.158 117.238,147.35 112.795,151.793 106.291,151.793
NetD503_2: D503.2 D504.1 S500.1 | length 24.9
  Bottom Layer w1.27: D504.1 D503.2 216.212,128.53 224.837,119.905 S500.1
NetD505_2: D505.2 D506.1 S500.3 | length 37.8
  Bottom Layer w1.27: D506.1@197.057,128.82 D506.1 D505.2 203.371,129.038 208.12,133.788 227.307,133.788 S500.3
NetDSP_OUT_3: DSP_OUT.3 U300.5 | length 39.8
  Bottom Layer w0.508: DSP_OUT.3 33.106,66.533 34.206,67.633 34.206,91.105 37.448,94.347 41.171,94.347 45.22,98.397 U300.5
NetJ200_2: J200.2 Q202.1 R206.2 | length 79.1
  Top Layer w0.508: Q202.1 136.098,148.237 154.077,130.257 R206.2
  Bottom Layer w0.508: R206.2 163.043,127.146 163.043,123.717 161.459,122.133 J200.2
NetJ201_3: J201.3 R206.1 | length 6
  Bottom Layer w0.508: J201.3 168.93,124.294 R206.1 R206.1
NetJ400_3: J400.3 R401.1 | length 4
  Bottom Layer w0.508: J400.3 R401.1@83.565,41.306
NetJ401_3: J401.3 R403.1 | length 6.6
  Bottom Layer w0.508: R403.1 89.762,43.838 89.762,37.301 J401.3
NetJ402_3: J402.3 R405.1 | length 9.2
  Bottom Layer w0.508: J402.3@95.93,37.289 J402.3@95.933,37.292 ; R405.1@96.532,46.376 R405.1 96.556,46.359 96.556,37.232 J402.3
NetJ403_3: J403.3 R407.1 | length 11.2
  Bottom Layer w0.508: J403.3 102.112,80.432 102.112,69.242 R407.1
NetJ404_3: J404.3 R409.1 | length 8.6
  Bottom Layer w0.508: R409.1 95.943,71.871 95.943,80.434 J404.3
NetJ405_3: J405.3 R411.1 | length 6.1
  Bottom Layer w0.508: J405.3 89.735,80.425 89.735,74.329 R411.1
NetK201_1: K201.1 LCD200.3 Q200.3 R201.1 | length 46.4
  Bottom Layer w0.508: K201.1 26.788,128.939 26.788,135.46 27.645,136.318 28.846,136.318 LCD200.3 33.414,136.504 36.453,133.465 ; R201.1 36.453,133.465 ; Q200.3 43.812,122.294 46.043,124.526 46.043,132.53 45.108,133.465 36.453,133.465
NetK202_1: K202.1 LCD200.2 Q201.3 R202.1 | length 17.9
  Bottom Layer w0.508: K202.1 28.307,123.194 28.844,123.194 31.493,125.843 Q201.3 33.574,125.843 33.276,126.141 R202.1 33.276,131.265 30.577,133.964 LCD200.2
NetPot500_2: Pot500.2 Pot500.3 R500.1 U502.1 | length 19.3
  Bottom Layer w0.508: U502.1 138.047,78.158 R500.1 139.607,87.087 139.612,87.083 145.738,87.083 Pot500.3 Pot500.2
NetPot502_2: Pot502.2 Pot502.3 R508.1 U504.1 | length 22.2
  Bottom Layer w0.508: R508.1 125.471,125.953 U504.1 125.725,120.916 129.077,124.268 Pot502.2 Pot502.3
NetR300_1: R300.1 U300.1 U300.2 | length 12.5
  Bottom Layer w0.508: R300.1 U300.1 U300.2
NetR302_1: R302.1 R303.2 U300.7 | length 12.8
  Bottom Layer w0.508: R303.2@35.886,109.595 R303.2 R302.1 35.921,103.435 40.14,99.216 U300.7 U300.7@40.105,98.685
NetR303_1: R303.1 R304.2 U300.6 | length 16.8
  Bottom Layer w0.508: U300.6 42.68,99.019 43.499,99.837 43.499,108.786 44.343,109.63 R303.1 R304.2
SPI_CLK: J103.3
SPI_CS0: J101.12
SPI_CS1: J103.2
SPI_CS2: J101.11
SPI_CS3: J100.7
SPI_RX: J103.5
SPI_TX: J103.4
UART_CTS: J100.2
UART_RTS: J100.1
UART_RX: J100.3
UART_TX: J100.4
pads on no net: J200.3 J201.2 J400.2 J401.2 J402.2 J403.2 J404.2 J405.2 MENU_CTRL200.1 MENU_CTRL201.1

## Polygon pours and split planes (outlines as drawn)
GND on Top Layer "GND" (solid, remove dead copper, shelved, pour order 2): 25.4,25.4 25.4,160.147 237.49,160.147 237.49,25.4
GND on Bottom Layer "GND" (solid, remove dead copper, pour order 0): 25.4,25.4 25.4,160.147 237.49,160.147 237.49,25.4